# Altium PCB FPGA_Board.PcbDoc (part 5 of 10)
Units mm, origin at the board's own origin, x right, y up, seen from the top; angles counter-clockwise.
Board outline 103.63 x 86.08 mm, 2 copper layers (Top Layer, Bottom Layer); 109 components, 200 nets, 667 pads, 237 vias.
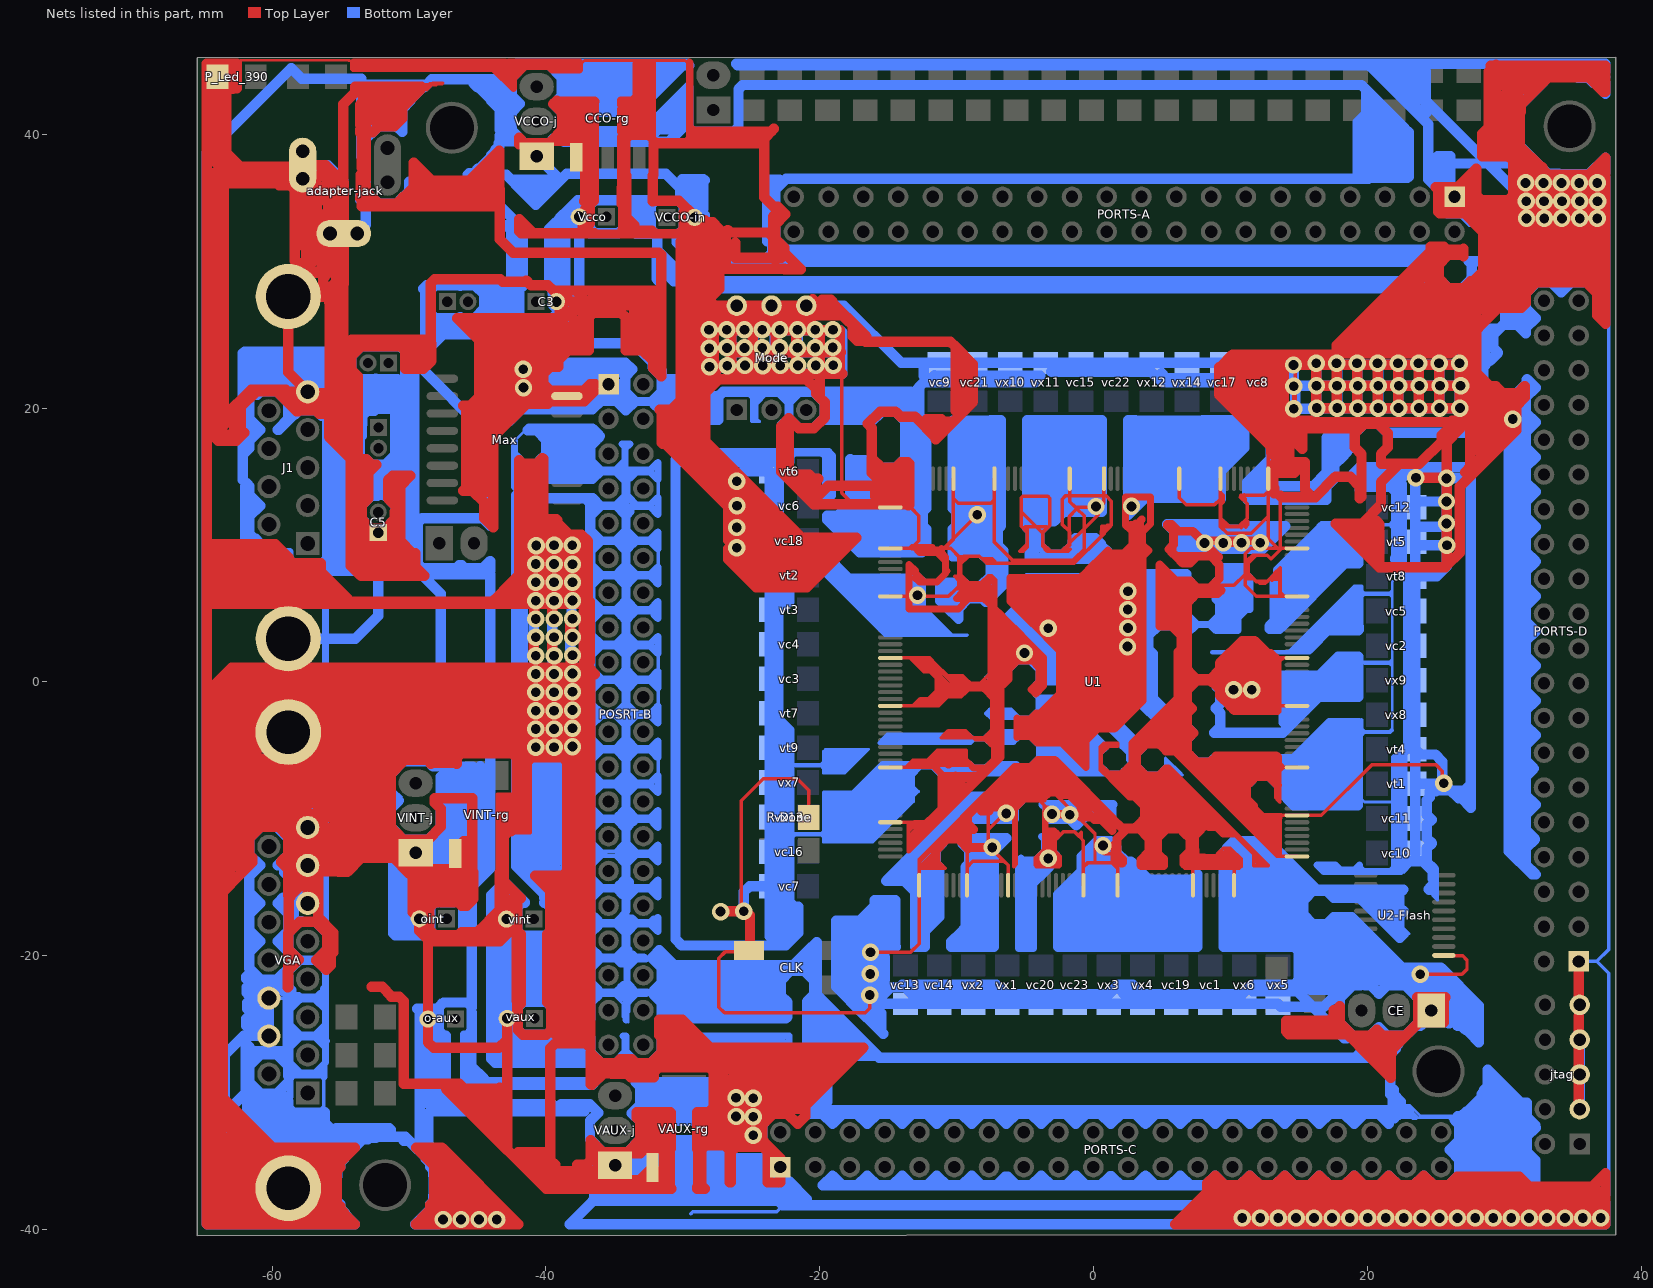
[diagram p5: the nets of this part, all layers, seen from the top]

## Via types
v1: diameter 1.27, hole 0.711, Top Layer to Bottom Layer, 237 vias

## Nets (pads, with @x,y where several pads share a name; then routed paths per layer and width w, separated by ;. In a path a pad name is that pad's centre, name@x,y a point inside that pad or via, vN(x,y) a via of type N, cw(c..) or ccw(c..) an arc to the next point about the centre after c; other vN are vias at no path point) (continued)
GND: (continued)
  Top Layer w0.762: VAUX-j.1@-35.856,-34.344 VAUX-j.1@-34.044,-34.344 ; VAUX-j.1@-35.856,-34.344 -34.95,-35.25 VAUX-j.1@-34.95,-35.3 ; -35.398,-28.428 -35.255,-28.571 ; -35.398,-28.428 -34.863,-28.428 -34.55,-28.115 -31.758,-28.115 -31.104,-27.461 ; -35.255,-28.571 -35.19,-28.636 -34.044,-28.636 -33.814,-28.866 -32.109,-28.866 -32.109,-28.483 ; -35.255,-28.571 -33.197,-28.571 -33.183,-28.585 -32.211,-28.585 -32.109,-28.483 ; VAUX-j.1@-34.044,-34.344 -33.95,-34.438 -33.124,-34.438 -32.685,-34 ; VAUX-j.1@-34.044,-34.344 -33.116,-33.416 -33.116,-32.104 -33.374,-31.846 -33.374,-31.434 -30.913,-31.434 -30.89,-31.457 -30.89,-34.063 -30.959,-34.132 -30.959,-36.892 -30.83,-37.021 -31.393,-37.021 ; -33.568,24.236 -32.955,24.236 ; -32.955,24.236 -32.164,23.445 ; -32.955,24.236 -32.955,27.263 -32.937,27.281 -32.837,27.281 -32.66,27.458 -32.66,24.532 -32.955,24.236 ; -32.748,-37.021 -31.851,-37.021 ; -32.748,-37.021 -32.225,-36.498 VAUX-rg.1@-32.225,-35.475 ; -32.685,-34 -32.206,-33.52 -32.206,-32.478 -31.977,-32.478 -31.81,-32.645 -31.81,-33.98 -32.039,-34.209 -32.476,-34.209 -32.685,-34 ; -32.685,-34 -32.706,-33.979 -32.706,-32.165 -32.56,-32.019 -31.475,-32.019 -31.434,-31.978 -31.393,-32.019 -31.393,-37.021 ; VAUX-rg.1@-32.225,-35.475 -31.851,-35.849 -31.851,-37.021 ; -32.164,23.445 -32.164,22.912 -31.588,22.336 -31.588,28.589 ; -32.109,-28.483 -31.767,-28.141 -28.083,-28.141 -27.741,-28.483 -27.741,-31.067 ; -31.851,-37.021 -31.393,-37.021 ; -31.104,-27.461 -30.648,-27.005 ; -31.104,-27.461 -31.104,-27.474 -31.247,-27.617 -29.153,-27.617 ; -31.104,-27.461 -31.104,-25.324 -30.805,-25.025 -30.405,-25.025 -28.226,-27.204 -18.073,-27.204 -21.861,-30.992 -23.641,-30.992 ; -30.648,-27.005 -30.313,-26.67 ; -30.648,-27.005 -30.648,-27.061 -30.62,-27.033 -29.95,-27.033 ; -30.648,-27.005 -30.648,-25.694 -30.534,-25.58 -28.526,-27.588 ; -30.313,-26.67 -30.192,-26.549 -30.434,-26.549 -30.313,-26.67 ; -30.313,-26.67 -29.95,-27.033 ; -29.95,-27.033 -29.737,-27.033 -29.182,-27.588 ; -29.95,-27.033 -29.395,-27.588 -29.182,-27.588 ; -29.731,39.34 -31.981,39.34 -32.145,39.176 -32.145,37.033 -32.214,36.964 -32.214,35.112 -32.177,35.149 -30.299,35.149 -29.151,34.001 VCCO-in.2@-29.151,33.925 -29.151,33.041 -29.151,28.484 -28.367,27.7 ; -29.731,39.34 -29.391,39.68 ; -29.731,39.34 -24.255,39.34 -24.07,39.155 ; -29.391,39.68 -29.389,39.682 -29.389,40.311 -29.264,40.186 -23.565,40.186 -23.362,40.388 -24.07,39.68 ; -29.391,39.68 -24.07,39.68 ; -29.182,-27.588 -29.153,-27.617 ; -29.182,-27.588 -28.526,-27.588 ; -29.16,22.575 -29.16,22.48 -29.161,22.479 -29.256,22.479 -29.16,22.575 ; -29.16,22.575 -28.93,22.805 ; -29.153,-27.617 -28.497,-27.617 ; -29.153,-27.617 -28.997,-27.773 -23.028,-27.773 ; -29.097,18.319 -29.568,17.848 -29.679,17.959 -29.679,19.402 -29.901,19.18 -29.929,19.18 -29.929,17.903 -29.374,17.348 -28.902,17.348 -28.791,17.459 -28.791,17.709 -29.097,18.015 -29.097,18.319 ; -29.097,18.319 -28.93,18.486 -28.93,22.805 ; -28.93,22.805 -28.93,27.561 -29.069,27.7 -28.367,27.7 ; -28.93,22.805 -28.706,23.029 v1@-28.431,23.029 ; -28.896,-37.021 -28.896,-36.841 -28.891,-36.836 -28.891,-36.829 ; -28.896,-37.021 -28.953,-37.021 -28.953,-36.891 -28.891,-36.829 ; -28.896,-37.021 -28.405,-37.021 -28.659,-36.767 ; -28.896,-37.021 -28.659,-36.784 -28.659,-36.767 ; -28.891,-36.829 -28.891,-34.183 ; -28.891,-34.183 -28.96,-34.114 -28.96,-31.434 -28.108,-31.434 -27.741,-31.067 ; -28.891,-34.183 -28.891,-32.584 -28.34,-32.033 ; -28.659,-36.767 -28.659,-34.183 -28.317,-33.841 -28.128,-33.841 ; -28.526,-27.588 -28.497,-27.617 ; -28.526,-27.588 -22.843,-27.588 -23.028,-27.773 ; -28.497,-27.617 -28.369,-27.617 -28.341,-27.645 -28.469,-27.645 -28.497,-27.617 ; v1@-28.431,23.029 -28.431,26.867 -28.292,27.006 ; v1@-28.431,23.029 -28.431,21.817 -28.403,21.789 -27.765,22.427 -27.737,22.427 v1@-27.737,22.556 ; -28.367,27.7 -28.152,27.485 -28.082,27.485 ; -28.367,27.7 -28.082,27.7 ; -28.367,27.7 -28.082,27.985 ; -28.34,-32.033 -28.239,-31.932 ; -28.34,-32.033 -28.441,-31.932 -28.239,-31.932 ; -28.34,-32.033 -28.227,-32.146 -26.276,-32.146 -25.535,-31.405 -25.535,-31.743 v1@-25.535,-31.832 ; -28.292,27.006 -28.153,27.006 -27.904,26.757 -26.738,26.757 -26.876,26.895 -27.071,26.895 -27.661,27.485 ; -28.292,27.006 -28.082,27.216 -28.082,27.485 ; -28.239,-31.932 -27.629,-31.932 -27.13,-31.433 v1@-26.167,-31.433 ; -28.239,-31.932 -27.741,-31.434 -27.741,-31.067 ; -28.128,-33.841 -28.012,-33.841 ; -28.128,-33.841 -28.07,-33.783 -28.012,-33.841 ; -28.082,27.485 -27.661,27.485 ; -28.082,27.485 -28.082,27.7 ; -28.082,27.7 -27.876,27.7 -27.661,27.485 ; -28.082,27.7 -28.082,27.985 ; -28.082,27.985 -27.337,28.73 -27.337,33.075 -27.826,33.564 -28.253,33.564 -28.406,33.717 -28.619,33.504 -28.619,28.924 -28.338,28.643 -28.338,28.484 -28.082,28.74 ; -28.082,27.985 -28.082,28.74 ; -28.082,28.74 -27.968,28.854 -27.925,28.854 -27.925,32.813 -28.082,32.97 -28.082,28.74 ; -28.012,-33.841 -26.933,-33.841 -26.804,-33.97 ; v1@-27.737,22.556 v1@-27.737,24.252 ; v1@-27.737,22.556 -27.813,22.48 -27.877,22.544 -27.877,24.112 v1@-27.737,24.252 ; v1@-27.737,24.252 v1@-27.737,25.675 ; v1@-27.737,25.675 -27.737,25.952 -27.903,26.118 -27.903,26.201 v1@-26.389,26.201 ; v1@-27.737,25.675 v1@-26.475,25.675 ; -27.661,27.485 Mode.6@-26.065,27.485 ; -26.804,-33.97 -26.591,-34.183 -26.591,-36.564 -26.49,-36.564 -26.49,-34.313 -26.148,-33.97 ; -26.804,-33.97 -26.148,-33.97 ; -26.475,22.5 -26.475,23.113 v1@-26.475,24.088 ; -26.475,22.5 -24.855,22.5 ; v1@-26.475,24.088 -24.885,24.088 ; v1@-26.475,24.088 v1@-26.475,25.675 ; v1@-26.475,25.675 v1@-25.215,25.675 ; v1@-26.475,25.675 -26.475,26.115 v1@-26.389,26.201 ; v1@-26.475,25.675 -26.065,26.085 -26.065,26.201 ; v1@-26.389,26.201 -26.065,26.525 ; v1@-26.389,26.201 -26.065,26.201 ; v1@-26.167,-31.433 -25.706,-31.433 -25.265,-30.992 v1@-24.934,-30.992 ; v1@-26.167,-31.433 v1@-26.167,-30.921 ; v1@-26.167,-30.921 -25.877,-30.921 v1@-26.167,-30.631 ; v1@-26.167,-30.921 -27.044,-30.921 -27.073,-30.892 -27.073,-28.657 -27.287,-28.443 -27.116,-28.272 -22.858,-28.272 -22.587,-28.272 ; v1@-26.167,-30.921 v1@-26.167,-30.631 ; v1@-26.167,-30.631 v1@-26.167,-30.479 ; v1@-26.167,-30.631 -26.19,-30.608 -26.19,-30.479 v1@-26.167,-30.479 ; v1@-26.167,-30.479 v1@-24.925,-30.479 ; -26.148,-33.97 -24.14,-33.97 -23.798,-34.313 ; -26.065,26.201 -26.065,26.525 ; -26.065,26.201 v1@-25.741,26.201 ; -26.065,26.525 v1@-25.741,26.201 ; -26.065,26.525 Mode.6@-26.065,26.787 ; Mode.6@-26.065,26.787 Mode.5@-23.525,26.787 ; Mode.6@-26.065,26.787 Mode.6@-26.065,27.485 ; Mode.6@-26.065,27.485 Mode.5@-23.525,27.485 ; v1@-25.741,26.201 v1@-23.899,26.201 ; v1@-25.741,26.201 v1@-25.215,25.675 ; -25.734,-29.012 -26.219,-29.497 -24.083,-29.497 -23.2,-29.497 ; -25.734,-29.012 -25.563,-28.841 -23.427,-28.841 -22.544,-28.841 -22.715,-29.012 ; -25.734,-29.012 -26.561,-29.012 -26.532,-29.041 -26.532,-30.394 -26.062,-29.924 -24.51,-29.924 -23.627,-29.924 ; -25.734,-29.012 -23.598,-29.012 -22.715,-29.012 ; -25.535,-32.758 -25.478,-32.758 -25.127,-33.109 v1@-25.023,-33.109 ; -25.535,-32.758 -25.421,-32.872 -27.828,-32.872 -28.398,-32.302 -28.398,-33.228 -28.184,-33.442 -24.866,-33.442 -25.023,-33.285 v1@-25.023,-33.109 ; -25.535,-32.758 -25.535,-32.502 ; -25.535,-32.502 -26.205,-32.502 v1@-25.535,-31.832 ; -25.535,-32.502 -25.151,-32.502 -25.023,-32.374 ; -25.535,-32.502 v1@-25.535,-31.832 ; v1@-25.535,-31.832 v1@-25.023,-31.32 ; v1@-25.215,25.675 v1@-24.885,25.675 ; v1@-25.023,-33.109 -25.023,-32.374 ; -25.023,-32.374 -24.567,-31.918 v1@-24.353,-31.704 ; -25.023,-32.374 v1@-25.023,-31.32 ; v1@-25.023,-31.32 -25.023,-31.248 v1@-24.987,-31.284 ; v1@-25.023,-31.32 v1@-24.987,-31.284 ; v1@-24.987,-31.284 v1@-24.934,-31.231 ; v1@-24.987,-31.284 v1@-24.934,-31.337 ; v1@-24.934,-31.337 -24.714,-31.557 -24.567,-31.704 v1@-24.353,-31.704 ; v1@-24.934,-31.337 v1@-24.934,-31.231 ; v1@-24.934,-31.231 v1@-24.695,-30.992 ; v1@-24.934,-31.231 v1@-24.934,-30.992 ; v1@-24.934,-30.992 v1@-24.695,-30.992 ; v1@-24.934,-30.992 -24.934,-30.488 v1@-24.925,-30.479 ; v1@-24.925,-30.479 -24.567,-30.479 -24.182,-30.479 ; -24.885,24.088 v1@-24.885,25.675 ; -24.885,24.088 v1@-23.235,24.088 ; -24.885,24.088 -24.885,22.53 -24.855,22.5 ; v1@-24.885,25.675 v1@-24.425,25.675 ; -24.878,12.768 -24.878,10.021 -24.989,9.91 -24.989,9.438 -24.268,8.717 -21.27,8.717 -20.854,9.133 -22.13,9.133 -24.295,11.298 -24.295,11.936 -24.323,11.908 ; -24.878,12.768 -24.878,12.935 -24.85,12.935 -21.52,9.605 -19.91,9.605 -21.298,8.217 -21.742,8.217 -21.798,8.273 -24.378,8.273 -25.266,9.161 -25.378,9.161 -25.516,9.299 -25.516,14.129 -25.406,14.129 -24.628,13.351 ; -24.878,12.768 -24.323,12.213 -24.323,11.908 ; -24.878,12.768 -25.461,13.351 -24.628,13.351 ; -24.855,22.5 -23.235,22.5 ; v1@-24.695,-30.992 -24.567,-30.864 -24.182,-30.479 ; v1@-24.695,-30.992 -24.567,-30.992 -23.641,-30.992 ; -24.628,13.351 -21.27,9.993 -18.744,9.993 -21.242,7.495 -21.409,7.662 -24.647,7.662 -26.701,9.716 -26.701,8.961 -24.645,6.905 -20.966,6.905 -17.964,9.907 ; -24.628,13.351 -24.124,13.351 ; v1@-24.425,25.675 v1@-23.295,25.675 ; v1@-24.425,25.675 v1@-23.899,26.201 ; v1@-24.353,-31.704 -24.211,-31.704 -24.068,-31.561 -23.435,-31.561 ; v1@-24.353,-31.704 -23.812,-31.163 ; -24.323,11.908 -24.323,9.91 -24.212,10.021 -24.212,10.548 -24.156,10.548 -23.796,10.188 -23.796,10.077 -22.963,9.244 -22.991,9.216 -23.823,9.216 -24.295,9.688 -24.601,9.688 -24.601,11.63 -24.323,11.908 ; -24.182,-30.479 -23.627,-29.924 ; -24.182,-30.479 -23.128,-30.479 ; -24.124,13.351 -28.361,17.588 -28.361,21.12 -27.385,22.096 -24.176,22.096 -20.975,22.096 -20.274,21.395 -20.274,21.041 -19.995,20.762 ; -24.124,13.351 -21.312,10.539 -18.596,10.539 ; -24.07,39.155 -24.07,35.407 -23.381,34.718 -23.076,34.718 -22.517,34.159 ; -24.07,39.155 -24.07,39.68 ; v1@-23.899,26.201 -23.525,26.575 ; v1@-23.899,26.201 -23.525,26.201 ; -23.812,-31.163 -23.641,-30.992 ; -23.812,-31.163 -21.081,-31.163 -21.053,-31.191 ; -23.798,-35.407 -23.798,-36.564 -22.915,-36.564 -22.882,-36.531 PORTS-C.1@-22.882,-35.435 -23.77,-35.435 -23.798,-35.407 ; -23.798,-34.313 -23.798,-34.154 -23.798,-33.866 ; -23.798,-33.866 -24.216,-33.448 -24.216,-32.342 -23.435,-31.561 ; -23.641,-30.992 -23.128,-30.479 ; -23.627,-29.924 -23.2,-29.497 ; -23.627,-29.924 -22.573,-29.924 ; -23.525,26.201 v1@-23.151,26.201 ; -23.525,26.201 -23.525,25.905 v1@-23.295,25.675 ; -23.525,26.201 -23.525,26.575 ; -23.525,26.575 v1@-23.151,26.201 ; -23.525,26.575 Mode.5@-23.525,26.787 ; Mode.5@-23.525,26.787 -21.683,26.787 ; Mode.5@-23.525,26.787 Mode.5@-23.525,27.485 ; Mode.5@-23.525,27.485 Mode.4@-20.985,27.485 ; -23.435,-31.561 -22.329,-31.561 -21.612,-32.278 -21.053,-31.719 -21.053,-31.191 ; -23.418,32.507 -23.733,32.822 -26.54,32.822 -26.725,33.007 -26.873,32.859 -26.873,30.164 -22.605,30.164 -22.565,30.124 -21.405,30.124 -22.611,31.33 -22.611,31.713 -23.234,32.336 -23.234,33.442 -22.517,34.159 ; -23.418,32.507 -22.809,31.898 -22.809,30.975 -23.412,30.975 ; -23.418,32.507 -23.418,33.987 -23.246,34.159 -22.517,34.159 ; -23.418,32.507 -23.418,30.981 -23.412,30.975 ; v1@-23.295,25.675 v1@-22.625,25.675 ; v1@-23.295,25.675 -23.235,25.615 v1@-23.235,24.088 ; -23.235,22.5 v1@-21.615,22.5 ; -23.235,22.5 v1@-23.235,24.088 ; v1@-23.235,24.088 v1@-21.705,24.088 ; -23.2,-29.497 -22.502,-29.497 -22.017,-29.012 -22.715,-29.012 ; -23.2,-29.497 -22.715,-29.012 ; v1@-23.151,26.201 -22.269,26.201 -21.683,26.787 ; v1@-23.151,26.201 v1@-22.625,25.675 ; -23.128,-30.479 -22.573,-29.924 ; -23.128,-30.479 -22.246,-30.479 -22.203,-30.522 -22.075,-30.522 -19.326,-27.773 -23.028,-27.773 ; -23.028,-27.773 -23.185,-27.93 -22.929,-27.93 -22.722,-28.136 -22.587,-28.272 ; -22.63,18.68 -22.814,18.68 -22.814,18.689 -22.255,19.248 -22.255,19.027 ; -22.63,18.68 -22.602,18.68 -22.324,18.958 ; -22.63,18.68 -22.713,18.597 -22.814,18.597 -22.814,15.346 -20.429,12.961 -17.561,12.961 -15.924,12.961 -15.901,12.984 -13.604,12.984 -13.527,12.907 -13.481,12.953 -13.481,15.95 -13.578,16.048 -14.053,16.048 -14.47,15.631 -15.48,15.631 -16.194,16.345 -16.194,15.269 -15.664,14.739 -15.664,14.323 ; -22.63,18.68 -22.352,18.958 -22.324,18.958 ; v1@-22.625,25.675 v1@-21.705,25.675 ; -22.587,-28.272 -20.593,-28.272 -22.245,-29.924 -22.573,-29.924 ; -22.587,-28.272 -21.754,-29.105 ; -22.573,-29.924 -21.754,-29.105 ; -22.324,18.958 -22.255,18.958 ; -22.324,18.958 -22.255,19.027 ; -22.255,18.958 -22.255,15.141 -22.158,15.044 -21.88,15.044 -20.687,13.851 -20.687,14.212 -20.77,14.295 -20.965,14.295 -21.187,14.517 -21.187,14.712 -21.603,15.128 -20.771,15.128 -20.493,14.85 -20.104,14.85 -20.243,14.711 -20.243,13.462 -19.382,14.323 -18.4,14.323 -15.664,14.323 ; -22.255,18.958 -22.255,19.027 ; -22.255,18.958 -21.965,18.958 ; -22.255,19.027 -22.144,19.138 -21.965,18.958 ; -21.965,18.958 -21.538,18.531 -20.432,18.531 -19.651,19.312 -19.651,20.418 -19.995,20.762 ; -21.754,-29.105 -21.633,-28.984 ; -21.754,-29.105 -21.633,-29.226 -21.633,-28.984 ; v1@-21.705,24.088 v1@-21.705,25.675 ; v1@-21.705,24.088 -21.705,22.59 v1@-21.615,22.5 ; v1@-21.705,24.088 -20.341,24.088 v1@-19.995,24.088 ; v1@-21.705,25.675 -21.705,25.825 -20.985,26.545 ; v1@-21.705,25.675 -20.975,25.675 ; -21.683,26.787 Mode.4@-20.985,27.485 ; -21.633,-28.984 -20.978,-28.329 -21.89,-28.329 -21.989,-28.428 -21.633,-28.784 -21.633,-28.984 ; v1@-21.615,22.5 -19.995,22.5 ; -20.985,26.545 v1@-20.115,25.675 ; -20.985,26.545 Mode.4@-20.985,27.485 ; Mode.4@-20.985,27.485 -20.284,26.784 -18.356,26.784 -17.246,25.674 -17.051,25.674 ; -20.975,25.675 v1@-20.115,25.675 ; v1@-20.115,25.675 -18.525,25.675 v1@-18.525,24.162 ; v1@-20.115,25.675 -19.995,25.555 v1@-19.995,24.088 ; -19.995,20.762 -19.995,22.5 ; -19.995,22.5 v1@-19.995,24.088 ; v1@-19.995,24.088 v1@-18.525,24.088 ; -18.596,10.539 -17.964,9.907 ; -18.596,10.539 -17.332,10.539 -17.964,9.907 ; v1@-18.525,24.088 v1@-18.525,24.162 ; v1@-18.525,24.088 -18.45,24.088 v1@-18.525,24.162 ; -17.051,25.674 -16.607,25.23 -16.607,24.925 -16.719,24.925 ; -16.719,24.925 -16.65,24.856 -10.456,24.856 -10.071,24.471 ; -16.719,24.925 -17.579,25.785 -17.579,25.23 -17.274,24.925 -16.719,24.925 ; -15.664,14.323 -15.497,14.323 -15.22,14.6 ; -15.664,14.323 -15.664,14.184 -15.969,13.879 -15.969,13.602 -15.941,13.574 -15.803,13.712 -14.054,13.712 -13.832,13.49 -13.832,15.1 -13.804,15.128 -13.832,15.156 -13.832,15.405 -13.86,15.405 -14.665,14.6 -14.443,14.378 -14.387,14.378 -14.47,14.295 -15.22,14.295 -15.22,14.6 ; -15.22,14.6 -15.22,14.822 -15.581,15.183 -15.581,15.211 -14.609,15.211 -15.22,14.6 ; -11.136,18.121 -12.195,19.18 -11.14,19.18 -10.973,19.013 -10.245,19.013 ; -11.136,18.121 -10.245,19.013 ; -10.245,19.013 -8.816,20.442 -8.816,23.216 -10.071,24.471 ; -5.125,-3.384 -4.653,-3.856 -4.545,-3.856 -4.471,-3.93 -0.943,-3.93 0.07,-2.917 1.341,-2.917 3.19,-1.068 3.19,-0.81 2.885,-0.505 ; -5.125,-3.384 -5.125,-3.302 -4.884,-3.061 ; -5.125,-3.384 -5.044,-3.303 -4.08,-3.303 ; -4.08,-3.303 -1.184,-3.303 -0.123,-2.242 1.196,-2.242 2.676,-0.762 2.676,5.237 v1@2.489,5.05 ; -4.08,-3.303 -1.506,-0.729 -1.506,0.283 0.505,2.294 ; -2.23,0.331 -2.23,0.176 -2.364,0.042 -2.364,0.197 -2.23,0.331 ; -2.23,0.331 -2.23,1.345 -1.812,0.927 -1.812,0.749 ; -2.23,0.331 -1.812,0.749 ; -2.003,2.294 -2.003,1.89 -1.779,1.666 -1.151,2.294 ; -2.003,2.294 -1.151,2.294 ; -1.812,0.749 -0.267,2.294 ; -1.151,2.294 v1@2.847,6.292 ; -1.151,2.294 -0.267,2.294 ; -0.782,-0.987 -1.248,-0.987 -1.683,-1.422 -1.683,-1.486 -1.876,-1.679 -1.088,-1.679 -1.57,-2.161 -2.406,-2.161 -2.535,-2.29 -2.535,-2.322 -2.986,-2.773 -1.506,-2.773 -0.267,-1.534 0.472,-1.534 ; -0.782,-0.987 -0.654,-1.115 -0.654,-1.293 -0.348,-0.987 ; -0.782,-0.987 -0.348,-0.987 ; -0.348,-0.987 -0.123,-0.762 0.472,-0.762 ; -0.348,-0.987 0.472,-0.987 ; -0.267,2.294 v1@2.489,5.05 ; -0.267,2.294 0.505,2.294 ; 0.44,-0.135 0.472,-0.167 ; 0.44,-0.135 -0.573,-0.135 -0.911,-0.473 -0.911,-0.087 1.679,2.503 1.679,1.731 ; 0.44,-0.135 1.051,-0.135 ; 0.472,-1.534 1.084,-1.534 1.453,-1.164 ; 0.472,-1.534 0.472,-0.987 ; 0.472,-0.987 1.276,-0.987 1.453,-1.164 ; 0.472,-0.987 0.472,-0.762 ; 0.472,-0.762 0.472,-0.167 ; 0.472,-0.762 1.373,-0.762 1.679,-0.456 1.679,1.731 ; 0.472,-0.167 1.019,-0.167 1.051,-0.135 ; 0.505,2.294 2.161,3.95 2.209,3.95 2.081,3.822 2.081,-0.537 1.453,-1.164 ; 0.505,2.294 1.197,2.294 1.888,2.985 1.888,1.94 1.679,1.731 ; 1.051,-0.135 1.196,0.01 1.196,1.152 0.343,0.299 0.247,0.299 1.679,1.731 ; v1@2.847,6.292 v1@3.103,6.548 ; v1@2.847,6.292 2.885,6.254 2.885,-0.505 ; 2.885,-0.505 3.103,-0.288 3.103,5.289 v1@3.103,6.548 ; 6.398,-39.181 8.309,-37.27 ; 6.398,-39.181 5.965,-39.614 25.26,-39.614 36.586,-39.614 ; 6.398,-39.181 7.607,-39.181 7.65,-39.224 11.081,-39.224 v1@11.112,-39.193 ; 8.178,-38.709 8.309,-38.578 8.309,-37.337 ; 8.178,-38.709 8.199,-38.709 8.235,-38.745 8.283,-38.697 10.104,-38.697 10.104,-37.709 9.853,-37.709 ; 8.178,-38.709 7.58,-38.709 7.866,-38.423 7.866,-37.78 8.309,-37.337 ; 8.309,-37.337 8.818,-36.828 9.092,-37.102 11.318,-37.102 11.485,-36.935 13.913,-36.935 13.949,-36.971 18.936,-36.971 18.972,-36.935 21.437,-36.935 21.472,-36.9 21.495,-36.923 24.043,-36.923 24.329,-37.209 26.186,-37.209 ; 8.309,-37.337 8.309,-37.27 ; 8.309,-37.27 8.309,-36.611 8.868,-36.052 9.585,-36.769 10.691,-36.769 11.408,-36.052 12.125,-36.769 13.231,-36.769 13.948,-36.052 14.665,-36.769 15.771,-36.769 16.488,-36.052 17.205,-36.769 18.311,-36.769 19.028,-36.052 19.745,-36.769 20.851,-36.769 21.568,-36.052 22.285,-36.769 23.391,-36.769 24.108,-36.052 24.825,-36.769 25.931,-36.769 26.554,-36.146 31.097,-36.146 31.819,-36.868 36.409,-36.868 37.387,-35.891 37.387,-37.198 ; 9.23,22.97 10.141,23.881 16.25,23.881 v1@17.746,23.881 ; 9.23,22.97 9.174,22.97 9.174,20.966 12.964,17.176 12.964,17.029 12.964,16.744 13.664,16.044 ; 9.23,22.97 9.958,22.97 10.334,23.346 13.565,23.346 13.64,23.421 13.892,23.169 13.892,19.713 14.321,19.284 14.321,18.956 13.664,18.299 ; 9.853,-37.709 8.961,-37.709 8.842,-37.59 8.77,-37.59 8.437,-37.923 8.628,-38.114 8.628,-38.161 9.401,-38.161 9.853,-37.709 ; 9.853,-37.709 9.996,-37.566 10.568,-37.566 10.568,-38.447 10.747,-38.626 11.556,-38.626 11.104,-38.174 11.104,-37.757 11.484,-37.757 11.746,-37.495 11.949,-37.698 11.949,-38.257 12.139,-38.447 12.698,-38.447 12.865,-38.614 12.865,-37.887 12.687,-37.709 ; 11.025,-8.499 11.025,-8.115 11.025,-7.524 ; 11.025,-8.499 11.106,-8.58 ; 11.025,-7.524 11.153,-7.524 ; 11.106,-8.58 11.106,-8.196 11.106,-7.57 11.153,-7.524 ; 11.106,-8.58 11.106,-8.762 11.35,-9.006 12.094,-9.75 12.305,-9.961 12.363,-9.961 ; v1@11.112,-39.193 v1@11.147,-39.158 ; v1@11.147,-39.158 v1(12.169,-39.158) v1@12.865,-39.158 ; 12.506,20.836 12.121,21.221 11.639,21.221 11.639,21.179 12.421,20.397 12.667,20.397 12.506,20.558 12.506,20.836 ; 12.506,20.836 13.095,20.247 ; 12.506,20.836 12.506,20.943 12.592,21.029 12.592,21.66 12.399,21.66 12.378,21.681 11.126,21.681 10.901,21.456 10.901,21.189 11.072,21.189 12.838,19.423 13.287,19.423 13.095,19.615 13.095,20.247 ; 12.687,-37.709 12.937,-37.459 13.746,-37.459 13.758,-37.447 13.758,-38.186 13.694,-38.251 ; 12.687,-37.709 12.437,-37.959 12.437,-37.542 12.306,-37.411 12.389,-37.411 12.687,-37.709 ; v1@12.865,-39.158 v1(13.478,-39.158) v1(14.787,-39.158) v1(16.096,-39.158) v1@16.607,-39.158 ; 13.095,20.247 13.664,19.678 13.664,19.137 ; 13.095,20.247 13.095,22.345 10.934,22.345 10.495,21.906 10.248,21.906 10.248,21.756 10.355,21.649 10.355,20.986 11.308,20.033 11.608,20.033 12.892,18.749 13.276,18.749 13.664,19.137 ; 13.664,16.044 13.664,17.729 13.664,18.299 ; 13.664,16.044 14.304,16.044 ; 13.664,18.299 13.312,17.947 13.312,17.846 13.236,17.77 11.47,19.536 11.167,19.536 9.799,20.904 9.799,21.766 9.735,21.83 9.735,22.28 9.896,22.441 10.227,22.441 10.623,22.837 13.319,22.837 13.683,22.473 13.683,19.156 13.664,19.137 ; 13.664,18.299 13.664,19.137 ; 13.694,-38.251 13.414,-37.971 13.258,-37.971 13.449,-38.162 13.449,-38.495 13.694,-38.251 ; 13.694,-38.251 13.997,-38.554 14.484,-38.554 14.484,-37.78 14.318,-37.614 14.39,-37.542 14.818,-37.542 ; 14.131,-24.829 14.156,-24.854 14.156,-25.625 ; 14.131,-24.829 14.061,-24.759 17.192,-24.759 ; 14.131,-24.829 14.061,-24.829 14.061,-25.53 14.156,-25.625 ; 14.131,-24.829 17.122,-24.829 17.192,-24.759 ; 14.156,-25.625 14.31,-25.471 17.318,-25.471 17.443,-25.346 17.829,-25.732 ; 14.304,16.044 14.304,17.54 14.218,17.626 14.218,17.776 14.688,18.246 14.882,18.246 14.882,17.379 15.224,17.037 15.224,18.588 ; 14.304,16.044 15.436,16.044 ; 14.818,-37.542 30.994,-37.542 31.013,-37.561 37.291,-37.561 37.387,-37.657 ; 15.224,18.588 14.999,18.813 14.999,19.092 15.813,19.092 15.92,18.985 26.127,18.985 26.202,19.06 26.202,18.77 25.432,18 25.432,17.754 25.521,17.665 ; 15.224,18.588 15.298,18.514 19.098,18.514 19.256,18.356 19.056,18.155 19.056,17.145 19.564,16.637 19.564,13.52 19.444,13.4 19.444,14.255 18.73,14.969 17.663,14.969 16.188,13.494 15.967,13.494 ; 15.436,16.044 15.436,14.025 15.967,13.494 ; v1@16.25,23.15 v1@17.746,23.15 ; v1@16.25,23.15 16.25,20.05 v1(16.3,20) v1(17.793,20) ; v1@16.607,-39.158 v1(17.405,-39.158) v1@18.411,-39.158 ; 17.192,-24.759 17.304,-24.759 17.571,-24.492 ; 17.192,-24.759 17.534,-24.417 ; 17.534,-24.417 17.534,-24.147 ; 17.534,-24.417 17.534,-24.455 17.571,-24.492 ; 17.534,-24.147 17.986,-23.695 17.986,-24.077 ; 17.571,-24.492 17.986,-24.906 ; 17.571,-24.492 17.986,-24.077 ; v1@17.746,21.638 v1@17.746,23.15 ; v1@17.746,21.638 17.746,20.046 v1(17.793,20) ; v1@17.746,21.638 v1(17.779,21.638) v1@19.243,21.638 ; v1@17.746,23.15 v1@19.243,23.15 ; v1@17.746,23.15 v1(17.746,23.275) v1@17.746,23.881 ; v1@17.746,23.881 17.977,23.881 18.22,24.124 ; v1@17.746,23.881 17.746,24.591 24.611,31.456 24.611,31.794 25.569,31.794 25.807,31.555 26.913,31.555 27.014,31.656 27.014,31.096 26.916,31.194 25.906,31.194 ; v1(17.793,20) v1(19.286,20) ; 17.829,-25.732 18.534,-25.732 19.205,-26.403 ; 17.986,-24.906 17.986,-24.077 ; 18.22,24.124 18.337,24.007 22.236,24.007 26.027,24.007 26.221,24.201 26.337,24.201 26.454,24.318 26.454,25.366 27.917,26.829 27.917,27.218 27.987,27.288 27.987,29.531 ; 18.22,24.124 18.22,24.396 18.336,24.512 25.716,24.512 26.118,24.914 26.118,25.755 27.322,26.959 27.529,26.959 27.529,28.305 27.49,28.344 26.882,27.736 26.882,27.373 26.726,27.373 25.419,26.066 25.419,25.25 25.548,25.121 25.379,24.952 18.698,24.952 24.551,30.805 24.551,30.83 24.655,30.726 24.655,29.536 25.639,28.552 26.557,28.552 26.687,28.422 ; v1@18.411,-39.158 v1(18.715,-39.158) v1(20.024,-39.158) v1(21.333,-39.158) v1@22.035,-39.158 ; 19.205,-26.403 19.44,-26.638 ; 19.205,-26.403 21.053,-26.403 ; v1@19.243,21.638 v1@19.243,23.15 ; v1@19.243,21.638 19.243,20.043 v1(19.286,20) ; v1@19.243,21.638 v1(19.282,21.638) v1@20.739,21.638 ; v1@19.243,23.15 v1@20.739,23.15 ; v1(19.286,20) v1(20.779,20) ; 19.44,-26.638 20.771,-26.638 21.155,-27.022 ; 19.44,-26.638 21.715,-28.913 21.715,-27.065 ; 19.977,10.058 19.977,9.519 20.867,8.63 ; 19.977,10.058 19.977,10.709 20.05,10.636 20.409,10.636 20.409,9.759 20.296,9.646 20.296,9.739 19.977,10.058 ; 19.977,10.058 18.887,11.148 20.097,11.148 20.641,11.692 20.641,11.759 20.867,11.533 20.867,8.63 ; 20.355,-25.705 20.669,-25.392 21.111,-25.834 ; 20.355,-25.705 20.84,-25.705 20.969,-25.834 21.111,-25.834 ; 20.355,-25.705 21.053,-26.403 ; v1@20.739,21.638 v1@20.739,23.15 ; v1@20.739,21.638 20.739,20.039 v1(20.779,20) ; v1@20.739,21.638 v1(20.786,21.638) v1@22.236,21.638 ; v1@20.739,23.15 v1@22.236,23.15 ; v1(20.779,20) v1(22.271,20) ; 20.867,8.63 20.867,8.383 17.691,11.559 19.614,11.559 20.986,12.93 20.986,14.592 22.318,15.924 ; 21.053,-26.403 21.625,-26.975 ; 21.053,-26.403 21.853,-26.403 22.001,-26.255 22.001,-26.599 ; 21.111,-25.834 22.766,-25.834 ; 21.155,-27.022 21.234,-27.101 21.234,-27.837 20.419,-27.022 21.155,-27.022 ; 21.155,-27.022 21.578,-27.022 21.625,-26.975 ; 21.431,26.105 21.327,26.001 20.926,26.001 21.055,26.13 21.379,26.13 21.404,26.105 21.431,26.105 ; 21.431,26.105 24.098,28.772 24.305,28.772 24.991,28.086 24.085,27.18 24.085,27.063 ; 21.431,26.105 24.473,26.105 24.486,26.118 24.486,26.985 24.668,26.985 24.746,27.063 ; 21.625,-26.975 21.715,-27.065 ; 21.625,-26.975 22.001,-26.599 ; 21.715,-27.065 21.715,-26.925 21.783,-26.857 ; 21.715,-27.065 21.783,-27.133 21.783,-26.857 ; 21.783,-26.857 22.001,-26.639 ; 22.001,-26.639 22.001,-26.599 ; 22.001,-26.639 22.805,-25.834 ; 22.001,-26.599 22.766,-25.834 ; v1@22.035,-39.158 v1(22.642,-39.158) v1(23.951,-39.158) v1(25.26,-39.158) v1(26.569,-39.158) v1(27.878,-39.158) v1(29.187,-39.158) v1(30.496,-39.158) v1(31.806,-39.158) v1(33.115,-39.158) v1(34.424,-39.158) v1(35.733,-39.158) v1@36.356,-39.158 ; v1@22.236,21.638 v1@22.236,23.15 ; v1@22.236,21.638 22.236,20.036 v1(22.271,20) ; v1@22.236,21.638 v1(22.289,21.638) v1@23.732,21.638 ; v1@22.236,23.15 v1@23.732,23.15 ; v1(22.271,20) v1(23.764,20) ; 22.318,15.924 23.78,15.924 25.521,17.665 ; 22.766,-25.834 22.805,-25.834 ; 22.766,-25.834 23.148,-25.453 ; 22.805,-25.834 23.187,-25.453 ; 23.148,-25.453 23.187,-25.453 ; 23.148,-25.453 23.694,-24.906 23.694,-23.094 23.627,-23.026 25.701,-23.026 25.585,-23.142 25.585,-24.858 CE.1@23.781,-24.858 ; 23.187,-25.453 CE.1@23.781,-24.858 ; v1@23.732,21.638 v1@23.732,23.15 ; v1@23.732,21.638 23.732,20.032 v1(23.764,20) ; v1@23.732,21.638 v1(23.793,21.638) v1@25.229,21.638 ; v1@23.732,23.15 v1@25.229,23.15 ; v1(23.764,20) v1(25.257,20) ; 24.085,27.063 24.085,26.687 24.02,26.622 22.997,26.622 22.959,26.584 22.661,26.584 24.137,28.06 24.137,27.646 23.554,27.063 24.085,27.063 ; 24.085,27.063 24.746,27.063 ; 24.746,27.063 25.328,27.063 26.687,28.422 ; 24.746,27.063 25.872,28.189 25.652,28.189 24.15,29.691 19.994,25.535 19.955,25.535 19.968,25.522 24.965,25.522 24.991,25.548 24.991,26.623 25.185,26.817 25.264,26.817 26.713,28.266 26.713,28.396 26.687,28.422 ; 25.192,30.053 25.192,29.47 25.906,28.756 27.021,28.756 ; 25.192,30.053 25.121,30.124 25.121,31.335 25.496,30.96 25.574,30.96 25.808,31.194 25.906,31.194 ; 25.192,30.053 25.192,30.48 25.906,31.194 ; v1@25.229,21.638 v1@25.229,23.15 ; v1@25.229,21.638 25.229,20.029 v1(25.257,20) ; v1@25.229,21.638 v1(25.296,21.638) v1@26.725,21.638 ; v1@25.229,23.15 26.6,23.15 v1(26.725,23.275) v1@26.725,21.638 ; v1(25.257,20) v1(26.75,20) ; 25.521,17.665 25.776,17.41 ; 25.521,17.665 26.75,18.894 ; v1(25.775,11.576) 25.8,11.551 v1(25.8,9.975) ; v1(25.775,11.576) v1(25.775,13.175) ; v1(25.775,11.576) 25.775,10 v1(25.8,9.975) ; v1(25.775,13.175) v1(25.776,14.865) v1(25.776,14.865) ; v1(25.775,13.175) 25.776,13.176 v1(25.776,14.865) ; v1(25.776,14.865) 25.776,17.41 ; 25.776,17.41 25.776,17.501 26.75,18.475 26.75,18.894 ; v1(25.8,9.975) 25.8,8.506 26.731,9.437 26.731,14.262 30.864,18.395 v1@30.864,19.029 ; 26.186,-37.209 31.27,-37.209 ; 26.186,-37.209 26.781,-36.614 26.84,-36.673 30.734,-36.673 31.27,-37.209 ; 26.687,28.422 27.021,28.756 ; v1@26.725,21.638 26.725,20.025 v1(26.75,20) ; 26.75,18.894 27.486,19.63 ; 26.75,18.894 v1(26.75,20) ; 26.859,36.379 27.424,35.814 27.424,35.429 27.424,34.714 ; 26.859,36.379 27.402,36.921 ; 26.859,36.379 26.62,36.139 24.997,36.139 25.154,35.982 25.154,34.342 25.273,34.223 27.091,34.223 28.2,33.114 28.463,32.851 ; 27.021,28.756 27.212,28.756 27.72,29.264 ; 27.021,28.756 27.529,29.264 27.72,29.264 ; 27.175,25.389 27.146,25.389 26.971,25.214 26.971,24.825 26.922,24.776 26.922,24.3 27.078,24.144 27.399,24.144 27.477,24.222 27.477,25.001 27.486,25.01 27.486,19.63 ; 27.175,25.389 27.633,25.389 27.946,25.702 ; 27.175,25.389 27.837,26.051 28.022,26.051 28.391,26.42 28.396,26.415 28.396,26.152 ; 27.402,36.921 27.402,35.977 27.409,35.97 28.382,34.998 ; 27.402,36.921 27.949,37.468 27.949,35.537 28.291,35.195 29.618,35.195 ; 27.424,34.714 28.098,34.714 28.2,34.816 28.382,34.998 ; 27.486,19.63 28.06,20.204 ; 27.486,19.63 27.486,15.661 27.146,15.321 27.214,15.321 30.453,18.56 30.453,20.311 30.638,20.496 30.356,20.778 29.062,20.778 28.897,20.943 ; 27.72,29.264 27.987,29.531 ; 27.946,25.702 28.396,26.152 ; 27.946,25.702 27.946,22.573 28.93,21.589 29.387,21.589 29.416,21.56 ; 27.987,29.531 28.2,29.744 28.463,30.007 ; 28.06,20.204 28.06,17.121 27.856,16.917 28.245,16.917 30.064,18.736 30.064,20.204 30.084,20.224 29.676,20.632 28.897,20.632 ; 28.06,20.204 28.06,21.78 28.848,20.992 ; 28.06,20.204 28.848,20.992 ; 28.382,34.998 28.901,34.478 ; 28.463,30.007 28.463,27.207 28.5,27.17 29.202,27.872 29.202,30.746 ; 28.463,30.007 29.202,30.746 ; 28.463,30.007 28.463,32.851 ; 28.463,32.851 28.463,34.04 28.901,34.478 ; 28.463,32.851 28.48,32.834 29.202,32.834 ; 28.848,20.992 29.416,21.56 ; 28.848,20.992 28.897,20.943 ; 28.897,20.632 28.566,20.632 28.566,18.084 28.527,18.045 28.809,18.045 29.636,18.872 29.636,19.991 29.665,20.02 29.178,20.02 29.101,20.097 29.101,18.93 28.897,18.726 28.897,20.632 ; 28.897,20.632 28.897,20.943 ; 28.897,20.943 28.897,20.973 29.45,21.526 ; 28.901,34.478 29.399,33.98 ; 28.901,34.478 29.618,35.195 ; 29.156,44.855 29.312,45.011 ; 29.156,44.855 29,45.011 29.312,45.011 ; 29.156,44.855 28.872,44.571 28.872,40.508 28.389,40.025 28.389,38.395 30.299,38.395 30.641,38.052 30.641,35.537 30.299,35.195 30.184,35.195 ; 29.156,44.855 29.919,44.092 30.085,44.092 ; 29.202,30.746 29.719,31.263 ; 29.202,30.746 29.202,32.834 ; 29.202,32.834 29.202,33.782 29.399,33.98 ; 29.312,45.011 29.387,45.011 ; 29.312,45.011 29.387,45.086 29.387,45.011 ; 29.387,45.011 37.387,45.011 37.387,44.514 ; 29.387,45.011 29.387,44.79 29.784,44.393 ; 29.399,33.98 29.893,33.486 ; 29.399,33.98 30.184,34.764 ; 29.416,21.56 29.45,21.526 ; 29.45,21.526 29.895,21.081 30.97,21.081 31.501,21.612 31.501,20.781 30.864,20.145 v1@30.864,19.029 ; 29.618,35.195 30.184,35.195 ; 29.682,39.803 29.165,39.803 29.017,39.655 29.017,39.064 29.091,38.99 30.643,38.99 31.308,38.325 31.308,35.297 30.79,34.779 30.199,34.779 30.184,34.764 ; 29.682,39.803 30.495,39.803 30.753,39.545 30.753,42.759 29.498,44.014 29.424,44.014 29.424,40.468 29.387,40.431 29.682,40.431 ; 29.682,39.803 29.682,39.655 29.239,39.212 30.716,39.212 32.193,37.735 ; 29.682,39.803 29.682,40.431 ; 29.682,40.431 30.051,40.431 30.125,40.505 30.125,42.574 29.904,42.795 29.904,42.426 29.682,42.204 29.682,40.431 ; 29.719,31.263 30.184,31.728 30.184,33.195 ; 29.719,31.263 29.719,27.687 29.756,27.65 30.938,27.65 31.381,28.093 31.381,31.998 ; 29.719,31.263 29.719,33.486 29.893,33.486 ; 29.784,44.393 30.085,44.092 ; 29.784,44.393 29.996,44.605 32.104,44.605 31.221,43.722 31.221,44.092 30.085,44.092 ; 29.893,33.486 30.184,33.195 ; 29.893,33.486 30.184,33.486 ; 30.184,33.195 30.452,32.927 ; 30.184,33.195 30.184,33.486 ; 30.184,33.486 30.184,33.856 ; 30.184,33.486 30.199,33.486 30.569,33.856 ; 30.184,33.856 30.184,33.951 ; 30.184,33.856 30.089,33.856 30.184,33.951 ; 30.184,33.856 30.569,33.856 ; 30.184,33.951 30.68,34.447 31.16,34.447 30.569,33.856 ; 30.184,33.951 30.184,34.764 ; 30.184,34.764 30.184,35.195 ; 30.452,32.927 30.901,32.478 ; 30.452,32.927 30.421,32.895 30.421,28.426 30.273,28.278 30.717,28.278 30.901,28.462 30.901,32.478 ; 30.452,32.927 30.569,33.043 31.233,33.043 31.381,33.191 ; 30.569,33.856 31.123,33.856 v1@31.825,34.558 ; 30.901,32.478 31.381,31.998 ; 30.901,32.478 30.901,32.637 31.381,33.117 ; 31.121,41.571 31.121,39.132 32.606,37.646 ; 31.121,41.571 31.189,41.639 31.189,42.149 33.206,44.166 36.154,44.166 37.233,43.087 37.387,43.087 37.387,44.22 ; 31.27,-37.209 31.294,-37.233 37.352,-37.233 37.387,-37.198 ; 31.381,31.998 31.899,31.48 ; 31.381,31.998 31.381,33.117 ; 31.381,33.117 31.418,33.154 ; 31.381,33.117 31.381,33.191 ; 31.381,33.191 31.049,33.523 31.825,34.299 v1@31.825,34.558 ; 31.381,33.191 31.418,33.154 ; 31.418,33.154 v1@32.119,33.855 ; 31.418,33.154 31.566,33.006 32.194,33.006 ; v1@31.677,35.095 v1@31.677,36.38 ; v1@31.677,35.095 31.677,34.854 v1@31.825,34.706 ; v1@31.677,35.095 v1@31.825,35.095 ; v1@31.677,36.38 31.677,36.921 v1@31.825,36.773 ; v1@31.677,36.38 v1@31.825,36.38 ; v1@31.825,34.558 31.899,34.632 v1@31.825,34.706 ; v1@31.825,34.558 v1@31.825,34.706 ; v1@31.825,34.706 v1@31.825,35.095 ; v1@31.825,35.095 v1@31.825,36.38 ; v1@31.825,35.095 v1@32.194,35.095 ; v1@31.825,36.38 v1@31.825,36.773 ; v1@31.825,36.773 32.082,36.516 v1@36.253,36.516 ; v1@31.825,36.773 31.825,37.735 32.193,37.735 ; 31.899,31.48 32.016,31.363 32.49,31.363 ; 31.899,31.48 31.899,29.571 32.083,29.755 35.851,29.755 35.925,29.829 35.925,35.924 35.889,35.888 v1@35.625,35.888 ; 31.899,31.48 31.899,32.564 31.972,32.637 31.972,32.784 32.194,33.006 ; v1@32.119,33.855 v1@32.748,33.855 ; v1@32.119,33.855 32.194,33.93 v1@32.194,35.095 ; 32.194,33.006 32.748,33.56 v1@32.748,33.855 ; 32.194,33.006 32.468,32.731 ; v1@32.194,35.095 32.194,35.851 32.231,35.888 34.881,35.888 ; v1@32.194,35.095 v1@32.728,35.095 ; 32.193,37.735 32.49,37.438 32.49,36.996 36.553,36.996 37.218,37.661 37.218,29.294 ; 32.468,32.731 v1@33.302,33.565 ; 32.468,32.731 32.489,32.711 33.007,32.711 ; 32.468,32.731 32.46,32.723 32.377,32.723 32.698,32.402 ; 32.49,31.363 32.49,30.347 35.261,30.347 35.334,30.42 35.223,30.531 v1@35.223,33.816 ; 32.49,31.363 32.49,32.046 32.453,32.083 32.453,32.157 32.698,32.402 ; 32.49,31.363 33.007,31.363 ; 32.698,32.402 33.007,32.711 ; 32.698,32.402 33.326,31.774 ; v1@32.728,35.095 32.637,35.186 32.711,35.26 v1@34.253,35.26 ; v1@32.728,35.095 32.748,35.075 v1@32.748,33.855 ; 32.794,44.551 37.35,44.551 37.387,44.514 ; 32.794,44.551 33.125,44.22 37.387,44.22 ; 33.007,31.363 33.007,31.048 34.337,31.048 34.484,30.901 34.706,31.123 v1@34.706,33.816 ; 33.007,31.363 33.007,31.455 33.326,31.774 ; 33.007,31.363 33.737,31.363 33.326,31.774 ; 33.007,32.711 33.302,33.006 v1@33.302,33.565 ; 33.007,32.711 33.672,32.711 ; v1@33.302,33.565 v1@34.295,34.558 ; v1@33.302,33.565 33.302,34.521 33.339,34.558 v1@34.295,34.558 ; 33.326,31.774 33.561,32.009 ; 33.561,32.009 33.339,32.231 33.339,32.378 33.672,32.711 ; 33.561,32.009 33.782,32.23 34.115,32.23 34.226,32.119 34.226,31.824 33.82,31.824 33.783,31.787 33.561,32.009 ; 33.672,32.711 33.893,32.932 33.893,33.93 34.004,34.041 34.004,33.893 34.226,33.671 34.226,32.748 34.189,32.711 33.672,32.711 ; v1@34.253,35.26 34.881,35.888 ; v1@34.253,35.26 v1@34.997,35.26 ; v1@34.295,34.558 v1@34.832,35.095 ; v1@34.295,34.558 34.558,34.558 34.706,34.41 v1@34.706,33.816 ; v1@34.706,33.816 v1@35.223,33.816 ; v1@34.832,35.095 v1@35.223,35.095 ; v1@34.832,35.095 v1@34.997,35.26 ; 34.881,35.888 v1@35.625,35.888 ; 34.881,35.888 v1@35.425,36.432 ; v1@34.997,35.26 v1@35.625,35.888 ; v1@34.997,35.26 35.223,35.26 v1@35.223,35.095 ; v1@35.223,33.816 v1@35.223,35.095 ; v1@35.425,36.432 v1@36.169,36.432 ; v1@35.625,35.888 v1@36.169,36.432 ; v1@36.169,36.432 v1@36.405,36.432 ; v1@36.169,36.432 v1@36.253,36.516 ; v1@36.253,36.516 36.734,36.997 v1@36.734,36.432 ; v1@36.253,36.516 36.442,36.516 36.405,36.479 v1@36.405,36.432 ; v1@36.356,-39.158 v1@36.918,-38.596 ; v1@36.356,-39.158 37.024,-39.158 v1@37.033,-39.167 ; v1@36.405,36.432 36.405,29.165 36.886,28.684 37.218,29.016 37.218,29.294 ; v1@36.405,36.432 v1@36.734,36.432 ; 36.418,-38.596 36.633,-38.381 37.133,-38.381 v1@36.918,-38.596 ; 36.418,-38.596 17.405,-38.596 15.543,-38.596 15.543,-38.181 15.609,-38.115 37.387,-38.115 ; 36.418,-38.596 v1@36.918,-38.596 ; 36.586,-39.614 37.387,-39.614 v1@37.387,-38.818 ; 36.586,-39.614 v1@36.841,-39.359 ; v1@36.734,36.432 36.734,29.032 36.845,28.921 37.218,29.294 ; v1@36.841,-39.359 37.132,-39.359 37.042,-39.269 v1@37.042,-39.176 ; v1@36.841,-39.359 v1@37.033,-39.167 ; v1@36.918,-38.596 37.165,-38.596 v1@37.387,-38.818 ; v1@37.033,-39.167 v1@37.042,-39.176 ; v1@37.033,-39.167 v1(37.042,-39.158) v1@37.042,-39.176 ; v1@37.387,-38.818 37.387,-38.115 ; 37.387,-38.115 37.387,-37.657 ; 37.387,-37.657 37.387,-37.198 ; 37.387,44.22 37.387,44.514
  Bottom Layer w0.203: -54.655,-35.152 -54.471,-34.967 -54.471,-34.878 -53.103,-33.51 -50.387,-33.51 -48.574,-35.323 -48.466,-35.431 -48.466,-35.584 -48.466,-36.905 -48.313,-37.058 ; -42.287,17.601 -41.227,18.661 -36.372,18.661 -35.953,18.242 -35.953,17.638 -36.348,17.638 -36.393,17.638 -36.651,17.638 -37.1,17.638 -37.465,18.003 ; -36.563,-24.78 -36.484,-24.701 -36.484,-23.533 -35.866,-22.915 -34.992,-22.915 -34.374,-23.533 -34.374,-24.458 -34.143,-24.69 -33.989,-24.843 -33.989,-23.363 -33.989,-22.892 -33.989,-22.41 -33.989,-22.037 -33.989,-20.823 -33.989,-20.299 -33.989,-19.54 -33.989,-19.497 -33.989,-18.283 -33.989,-17.803 -33.989,-17.257 -33.989,-15.743 -33.989,-14.417 -33.989,-13.203 -33.989,-11.877 -33.989,-10.663 -33.989,-9.337 -33.989,-8.123 -33.989,-6.797 -33.989,-5.583 -33.989,-4.907 -33.989,-4.257 -33.989,-3.043 -33.989,-1.717 -33.989,-0.503 -33.989,0.537 -33.989,0.823 -33.989,2.037 -33.989,2.546 -33.989,2.763 -33.989,3.363 -33.989,4.577 -33.989,5.903 -33.989,7.117 -33.989,8.443 -33.989,9.657 -33.989,10.983 -33.989,12.197 -33.989,13.523 -33.989,14.182 -34.096,14.289 -34.219,14.412 -34.222,14.415 -34.992,15.185 -35.831,15.185 -36.046,15.4 -36.095,15.449 ; -33.597,20.571 -33.473,20.695 -33.235,20.695 ; -33.506,20.48 -33.259,20.48 -33.139,20.6 ; -33.449,20.141 -33.326,20.265 -33.175,20.265 ; -31.233,19.55 -31.324,19.642 -31.511,19.642 ; -27.399,19.143 -27.12,19.423 -27.12,20.741 -26.941,20.92 -25.189,20.92 -25.01,20.741 -25.01,19.046 -24.966,19.002 -24.827,19.002 ; -22.234,-5.971 -22.179,-6.026 -21.661,-6.026 ; -21.955,-11.887 -21.955,-11.369 -21.776,-11.191 -19.903,-11.191 -19.72,-11.374 -19.72,-11.71 -18.039,-11.71 -17.988,-11.659 -17.759,-11.43 -17.206,-10.877 -16.687,-10.357 -16.241,-9.912 -13.748,-7.419 -13.456,-7.127 -13.216,-6.887 -12.614,-6.285 -11.62,-6.285 -10.329,-6.285 -9.03,-6.285 -8.784,-6.285 -7.866,-6.285 -4.716,-6.285 -4.563,-6.285 -1.401,-6.285 -1.06,-6.285 -0.704,-6.641 -0.552,-6.793 6.483,-6.793 5.24,-5.55 5.24,-6.089 4.689,-6.64 3.911,-6.64 3.258,-5.987 3.03,-5.759 2.747,-5.476 2.686,-5.415 2.516,-5.245 1.957,-4.686 1.957,-4.371 0.228,-2.642 -0.157,-2.257 -0.541,-1.873 -1.118,-1.296 -1.347,-1.067 -1.398,-1.017 -4.329,-1.017 -4.135,-1.211 -4.135,-1.989 -4.686,-2.54 -5.464,-2.54 -5.704,-2.3 -5.74,-2.3 -5.776,-2.3 -5.839,-2.3 -5.882,-2.3 -7.512,-2.3 -7.849,-2.3 -7.885,-2.3 ; -19.784,18.864 -20.09,18.864 ; -17.245,-5.503 -17.243,-5.505 ; -15.001,6.16 -15.065,6.224 -15.398,6.557 -15.769,6.928 -16.153,7.312 -16.477,7.636 -16.655,7.814 ; -6.16,1.908 -6.414,1.654 -6.693,1.375 ; -5.626,1.254 -5.565,1.314 ; 9.051,-5.64 9.422,-5.64 13.337,-5.64 14.23,-5.64 ; 9.684,-5.813 13.51,-5.813 14.057,-5.813 14.23,-5.64 ; 16.932,-7.07 17.048,-7.07 17.585,-7.07 18.083,-7.07 18.097,-7.084 18.634,-7.621 19.291,-8.278 19.783,-8.77 21.942,-8.77 21.957,-8.785 ; 18.134,4.309 18.411,4.586 18.8,4.975 19.316,5.491 19.57,5.745 19.595,5.77 19.595,6.201 19.774,6.38 21.626,6.38 21.805,6.201 ; 18.584,6.565 19.034,7.014 19.595,7.014 19.595,6.674 19.774,6.495 21.626,6.495 21.805,6.674 ; 19.316,1.835 19.705,1.445 21.626,1.445 21.805,1.624 ; 19.798,1.348 19.816,1.33 21.626,1.33 21.805,1.151 ; 21.767,-3.536 21.805,-3.498 21.805,-3.426 ; 21.801,-31.72 21.921,-31.84 21.93,-31.84 22.054,-31.84 ; 21.862,-30.915 22.237,-30.915 23.084,-30.915 23.868,-31.699 26.584,-31.699 27.177,-31.106 27.203,-31.106 ; 22.353,-18.673 22.748,-18.673 23.033,-18.388 22.61,-17.964 22.61,-17.71 ; 24.769,-15.584 25.132,-15.947 25.132,-15.769 ; 24.769,-15.188 24.769,-14.83 24.769,-14.393 ; 25.051,-15.688 25.132,-15.769 ; 25.132,-15.15 25.132,-15.769 ; 27.556,-35.214 27.521,-35.179 27.211,-34.869 26.433,-34.091 26.433,-33.727 26.433,-32.309 25.964,-31.84 23.732,-31.84 22.954,-31.062 22.711,-31.062 22.119,-31.654 22.333,-31.654 22.777,-31.21 22.953,-31.21 23.568,-31.825 23.568,-31.898 23.333,-31.898 23.275,-31.84 22.701,-31.84 ; -33.235,20.695 -33.139,20.6 ; -33.235,20.695 -33.044,20.695 ; -33.175,20.265 -33.041,20.398 ; -33.175,20.265 -32.452,20.265 -32.201,20.014 ; -33.139,20.6 -33.044,20.695 ; -33.139,20.6 -33.111,20.571 -33.111,20.468 -33.041,20.398 ; -33.044,20.695 -32.123,20.695 -32.09,20.662 -31.952,20.524 -31.952,20.062 -32,20.014 ; -33.041,20.398 -33.035,20.392 -32.844,20.392 -32.828,20.376 -32.247,20.376 -32.295,20.328 -32.306,20.328 -32.151,20.173 -32.095,20.173 -32.095,20.436 -32.206,20.547 -32.218,20.559 -32.949,20.559 -33.004,20.504 -33.004,20.436 -33.041,20.398 ; -32.201,20.014 -32.158,19.97 ; -32.201,20.014 -32,20.014 ; -32.158,19.97 -32.044,19.97 -32,20.014 ; -32.158,19.97 -31.829,19.642 -31.623,19.642 ; -31.623,19.642 -31.511,19.642 ; -31.623,19.642 -31.918,19.937 -31.895,19.96 -31.829,19.96 -31.511,19.642 ; -24.827,19.002 -24.658,19.002 ; -24.827,19.002 -24.58,19.249 ; -24.658,19.002 -24.382,19.002 -24.58,19.2 ; -24.658,19.002 -24.58,19.08 -24.58,19.2 ; -24.58,19.2 -24.58,19.249 ; -24.58,19.249 -24.58,20.135 ; -24.58,20.135 -24.72,19.995 -24.699,19.974 -24.699,19.133 -24.822,19.133 -24.876,19.187 -24.834,19.229 -24.834,20.145 -24.801,20.178 -24.58,20.178 ; -24.58,20.135 -24.58,20.178 ; -24.58,20.178 -24.58,20.302 -23.962,20.92 -23.088,20.92 ; -23.088,20.92 -22.693,20.92 -21.817,20.92 -21.422,20.92 ; -23.088,20.92 -22.47,20.302 -22.47,19.428 -23.034,18.864 -21.476,18.864 -21.644,19.033 ; -22.04,19.57 -22.04,20.302 -21.422,20.92 ; -22.04,19.57 -22.17,19.44 -22.197,19.467 -22.197,20.042 -22.311,20.042 -22.32,20.033 -22.32,19.385 -22.423,19.282 -22.11,19.282 -21.982,19.154 -22.582,19.154 -22.703,19.033 -21.644,19.033 ; -22.04,19.57 -22.04,19.428 -21.644,19.033 ; -21.661,-6.026 -21.776,-6.141 -19.924,-6.141 -19.745,-6.32 -19.745,-6.66 -18.18,-6.66 -16.547,-5.028 ; -21.661,-6.026 -19.924,-6.026 -19.911,-6.014 ; -21.422,20.92 -20.548,20.92 -19.93,20.302 -19.93,19.428 ; -20.394,18.864 -19.93,19.328 -19.93,19.428 ; -20.394,18.864 -20.29,18.864 ; -20.394,18.864 -20.494,18.864 -19.93,19.428 ; -20.298,9.121 -21.776,9.121 -21.868,9.213 -21.868,8.914 -21.776,9.006 -20.183,9.006 ; -20.298,9.121 -20.183,9.006 ; -20.298,9.121 -20.068,9.121 ; -20.29,18.864 -20.09,18.864 ; -20.29,18.864 -20.19,18.964 -20.09,18.864 ; -20.183,9.006 -19.953,9.006 ; -20.068,9.121 -19.953,9.006 ; -20.068,9.121 -19.924,9.121 -19.745,9.3 ; -19.953,9.006 -19.924,9.006 ; -19.924,9.006 -19.745,9.006 ; -19.924,9.006 -19.745,8.828 ; -19.911,-6.014 -19.745,-5.848 -19.745,-5.072 -19.597,-4.924 -16.444,-4.924 -16.501,-4.981 ; -19.911,-6.014 -19.608,-6.014 -19.608,-5.17 -19.513,-5.075 -16.909,-5.075 ; -19.745,8.828 -19.745,7.873 -15.258,3.386 -9.243,3.386 -9.211,3.418 -10.304,3.418 -11.254,4.368 ; -19.745,8.828 -19.745,9.006 ; -19.745,9.006 -19.593,8.854 -19.373,8.633 -17.667,6.928 -17.641,6.902 -15.107,4.368 -14.834,4.368 -12.415,4.368 -11.98,4.368 -11.469,4.368 -11.254,4.368 ; -19.745,9.006 -19.745,9.3 ; -19.745,9.3 -19.745,9.8 -17.759,7.814 -16.655,7.814 ; -18.931,-5.685 -18.275,-5.685 -18.438,-5.848 -19.058,-5.848 -19.076,-5.83 -18.931,-5.685 ; -18.931,-5.685 -19.13,-5.685 -19.195,-5.75 -19.195,-5.993 -18.405,-5.993 -17.97,-5.558 -17.9,-5.558 -17.921,-5.537 -18.783,-5.537 ; -18.931,-5.685 -18.783,-5.537 ; -18.783,-5.537 -19.316,-5.537 -19.316,-6.068 -19.253,-6.131 -18.309,-6.131 -17.693,-5.515 ; -18.783,-5.537 -18.761,-5.515 -17.693,-5.515 ; -17.693,-5.515 -17.47,-5.515 ; -17.693,-5.515 -17.561,-5.383 -19.375,-5.383 -19.438,-5.446 -19.417,-5.467 -19.417,-6.343 -19.39,-6.316 -18.271,-6.316 -17.47,-5.515 ; -17.47,-5.515 -17.349,-5.515 -16.909,-5.075 ; -17.47,-5.515 -17.216,-5.261 -19.454,-5.261 -19.539,-5.346 -19.539,-6.173 -19.708,-6.173 -19.719,-6.184 -19.565,-6.338 -19.565,-6.502 -18.208,-6.502 -18.197,-6.491 -18.197,-6.459 -17.243,-5.505 ; -17.243,-5.505 -17.237,-5.511 -17.209,-5.511 -17.222,-5.498 -17.222,-5.484 ; -17.243,-5.505 -17.222,-5.484 ; -17.222,-5.484 -16.813,-5.075 -16.826,-5.075 ; -17.222,-5.484 -17.222,-5.424 -17.064,-5.266 -17.017,-5.266 -16.826,-5.075 ; -16.909,-5.075 -16.826,-5.075 ; -16.909,-5.075 -16.849,-5.015 -16.766,-5.015 ; -16.826,-5.075 -16.766,-5.015 ; -16.766,-5.015 -16.732,-4.981 -16.501,-4.981 ; -16.766,-5.015 -16.56,-5.015 -16.547,-5.028 ; -16.655,7.814 -12.668,7.814 -12.332,7.478 -12.332,5.446 -11.254,4.368 ; -16.547,-5.028 -16.501,-4.981 ; -7.516,0.304 -7.627,0.415 -7.488,0.415 -7.461,0.442 -7.323,0.304 ; -7.516,0.304 -7.323,0.304 ; -7.516,0.304 -7.917,0.304 -7.705,0.515 -7.549,0.515 -6.693,1.371 ; -7.323,0.304 -7.05,0.304 ; -7.05,0.304 -6.956,0.304 -6.379,0.882 -5.997,0.882 -5.675,1.204 -5.794,1.204 -5.997,1.001 -6.051,1.001 -5.738,1.314 -5.565,1.314 ; -7.05,0.304 -6.693,0.661 -6.693,0.963 -6.693,0.976 -6.693,1.371 ; -6.902,3.738 -7.354,4.189 -7.166,4.189 -4.939,6.416 -4.939,7.854 0.143,7.854 ; -6.902,3.738 -6.693,3.529 ; -6.902,3.738 -6.902,3.915 ; -6.902,3.915 -7.068,4.081 -7.09,4.059 -7.135,4.059 -7.135,4.194 -6.902,4.427 -6.902,3.915 ; -6.902,3.915 -6.693,3.706 -6.693,3.529 ; -6.693,1.371 -6.693,1.375 ; -6.693,1.375 -6.693,3.529 ; -5.565,1.314 -5.489,1.39 -4.711,1.39 -4.16,0.839 -4.16,0.061 -4.374,-0.153 -0.132,-0.153 -0.132,7.154 0.333,7.619 ; 0.143,7.854 0.297,7.854 ; 0.143,7.854 0.265,7.732 0.265,7.822 0.297,7.854 ; 0.297,7.854 0.527,7.854 ; 0.333,7.619 0.292,7.619 0.527,7.854 ; 0.333,7.619 0.568,7.854 0.527,7.854 ; 14.23,-5.64 14.357,-5.513 16.265,-3.605 16.66,-3.605 19.379,-3.605 19.702,-3.605 21.626,-3.605 21.805,-3.426 ; 21.805,-3.426 21.805,1.151 ; 21.805,1.151 21.805,1.624 ; 21.805,1.624 21.805,6.201 ; 21.805,6.201 21.805,6.674 ; 21.805,6.674 21.805,7.333 ; 21.805,7.333 21.818,7.346 21.805,7.36 21.805,7.333 ; 22.054,-31.84 21.927,-31.713 22.215,-31.713 22.304,-31.802 22.266,-31.84 22.054,-31.84 ; 22.054,-31.84 22.104,-31.89 22.351,-31.89 22.401,-31.84 22.534,-31.84 ; 22.534,-31.84 22.466,-31.772 22.836,-31.402 22.998,-31.402 23.346,-31.75 23.346,-31.779 23.25,-31.683 22.858,-31.683 ; 22.534,-31.84 22.701,-31.84 ; 22.701,-31.84 22.858,-31.683 ; 22.858,-31.683 22.71,-31.683 22.828,-31.565 22.976,-31.565 22.858,-31.683